# Altium PCB NaiS802HD_0.6.PcbDoc (part 2 of 2)
Units mm, origin at the board's own origin, x right, y up, seen from the top; angles counter-clockwise.
Board outline 60 x 38 mm, 4 copper layers (Top, INT1, GND, Bottom), stack 0.965 mm thick; 174 components, 229 nets, 707 pads, 347 vias.
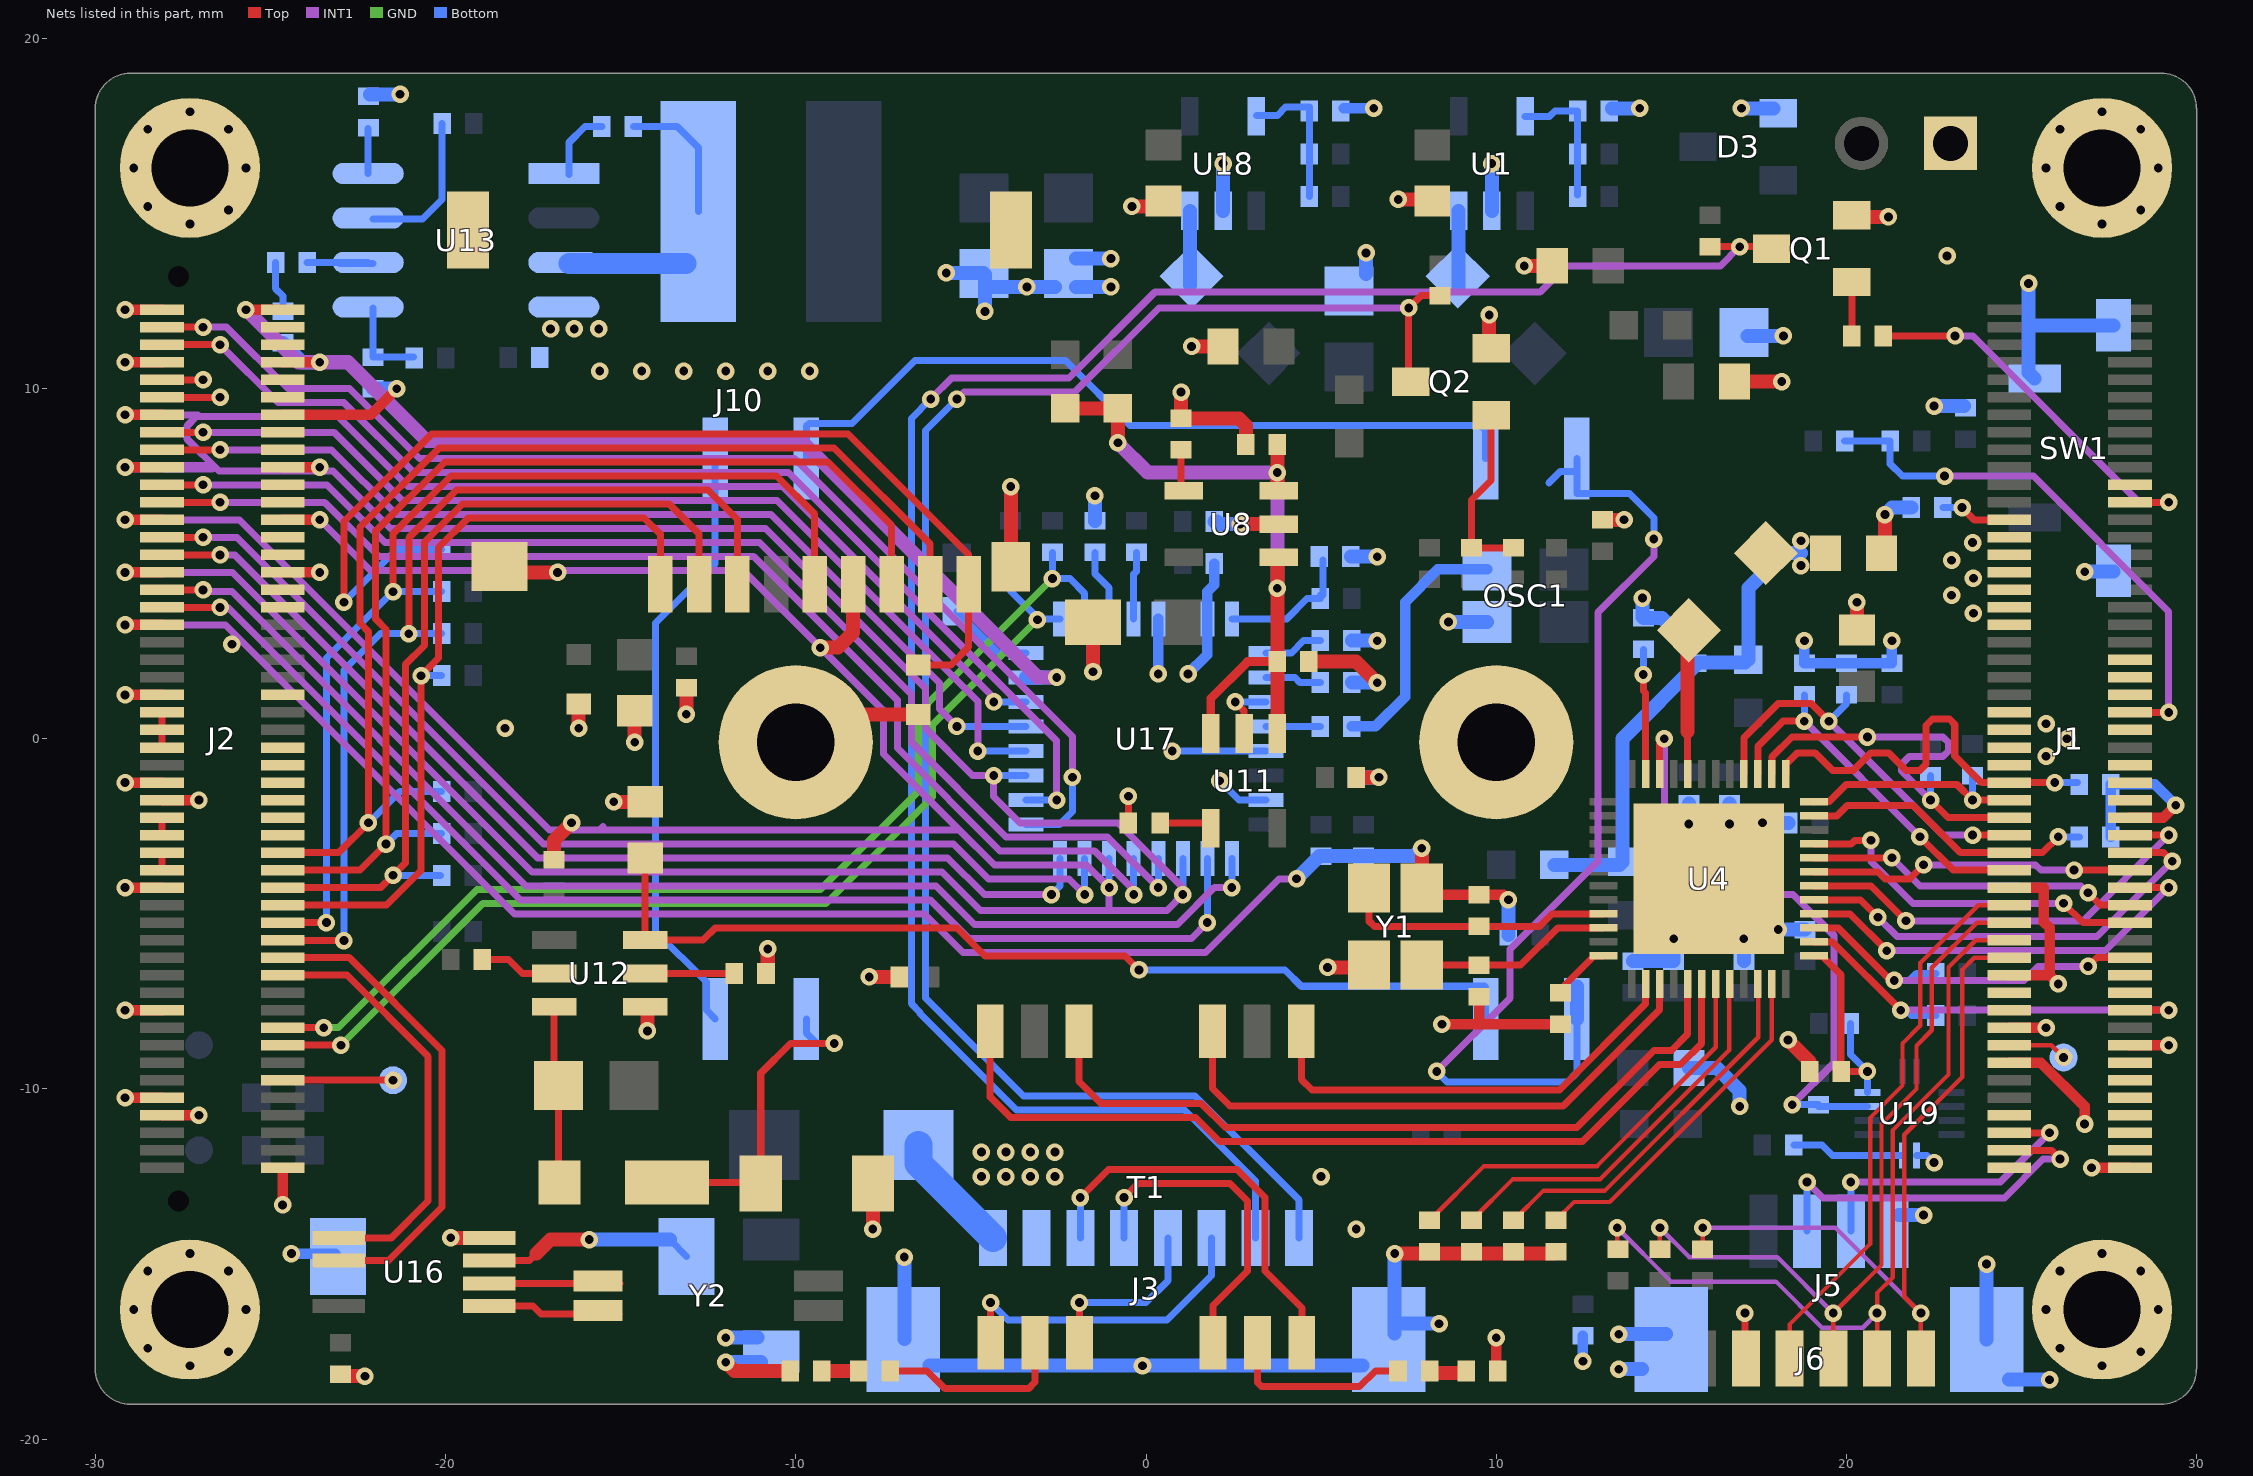
[diagram p4: the nets of this part, all layers, seen from the top]

## Via types
v1: diameter 0.5, hole 0.25, Top to Bottom, tented both sides, 345 vias
v2: diameter 0.5, hole 0.25, Top to Bottom, 2 vias

## Nets (pads, with @x,y where several pads share a name; then routed paths per layer and width w, separated by ;. In a path a pad name is that pad's centre, name@x,y a point inside that pad or via, vN(x,y) a via of type N, cw(c..) or ccw(c..) an arc to the next point about the centre after c; other vN are vias at no path point) (continued)
GND: BAT1.2 BC1.2 BC2.1 BC3.1 BC4.2 BC5.2 BC6.2 BC7.2 BC8.2 BC9.2 BC10.2 BC11.2 BC12.2 BC13.2 BC14.2 BC15.2 BC16.2 BC17.2 BC18.1 BC19.2 BC20.1 BC21.1 BC24.1 BC25.1 BC26.1 BC27.1 BC28.1 BC29.1 C1.1 C2.2 C4.2 C5.2 C7.2 C8.2 C9.2 C11.2 C17.1 C18.1 C19.2 C20.2 C21.2 C22.2 C23.1 C24.1 C25.1 C26.2 C27.1 C31.1 C32.2 C33.2 C34.1 C35.2 C36.2 C38.2 C39.2 C40.2 C41.2 C42.2 D3.1 J1.2 J1.13 J1.16 J1.17 J1.23 J1.33 J1.42 J1.47 J1.49 J1.51 J1.53 J1.63 J1.65 J1.67 J1.69 J1.71 J1.73 J2.1 J2.8 J2.10 J2.20 J2.34 J2.44 J2.46 J2.56 J2.64 J2.69 J2.70 J2.75 J2.76 J2.81 J2.82 J2.87 J2.88 J2.93 J2.94 J2.99 J2.100 J3.2 J3.9 J3.10 J4.1 J5.4 J5.5 J5.6 J6.2 J7.1 J7.2 J10.6 J10.9 J10.10 J10.11 J10.12 MH1.1 MH2.1 MH3.1 MH4.1 OSC1.2 Q1.2 Q2.2 R15.1 R16.1 R17.1 R19.2 R20.2 R21.2 R29.1 R31.1 R32.1 R34.1 R36.1 R38.1 R61.1 R68.2 SW1.2 SW1.3 SW1.4 TVS1.2 TVS2.2 U1.2 U4.M1 U8.2 U11.2 U12.4 U13.4 U16.4 U17.1 U17.3 U17.7 U17.10 U17.15 U17.18 U17.19 U17.25 U17.27 U17.31 U18.2 U19.7 Y1.2 Y1.4 | length 411.7
  Top w0.2: J2.1@-24.652,-12.257 J2.1@-24.645,-12.25 ; C31.1@-0.5,-2.4 v1(-0.5,-1.643) ; v1(2.55,1.05) 2.8,0.8 U11.2@2.8,0.15 ; J6.2@17.1,-17.875 v1(17.1,-16.4) ; J1.33@24.645,-4.25 J1.33@25,-4.25
  Top w0.3: v1(-29.15,-10.25) J2.10@-28.095,-10.25 ; v1(-29.15,-7.75) J2.20@-28.095,-7.75 ; v1(-29.15,-4.25) J2.34@-28.095,-4.25 ; v1(-29.15,-1.25) J2.46@-28.095,-1.25 ; v1(-29.15,1.25) J2.56@-28.095,1.25 ; v1(-29.15,3.25) J2.64@-28.095,3.25 ; v1(-29.15,4.75) J2.70@-28.095,4.75 ; v1(-29.15,6.25) J2.76@-28.095,6.25 ; v1(-29.15,7.75) J2.82@-28.095,7.75 ; v1(-29.15,9.25) J2.88@-28.095,9.25 ; v1(-29.15,10.75) J2.94@-28.095,10.75 ; v1(-29.15,12.25) J2.100@-28.095,12.25 ; J2.8@-28.095,-10.75 v1(-27.04,-10.75) ; J2.44@-28.095,-1.75 v1(-27.04,-1.75) ; v1(-25.7,12.25) J2.99@-24.645,12.25 ; v1(-24.652,-13.312) J2.1@-24.652,-12.257 ; J2.69@-24.645,4.75 v1(-23.59,4.75) ; J2.75@-24.645,6.25 v1(-23.59,6.25) ; J2.81@-24.645,7.75 v1(-23.59,7.75) ; J2.87@-24.645,9.25 -22.138,9.25 v1(-21.394,9.994) ; J2.93@-24.645,10.75 v1(-23.59,10.75) ; Y1.4@8.069,-4.457 C17.1@9.505,-4.457 10.207,-4.457 v1(10.35,-4.6) ; v1(8.45,-8.15) R32.1@11.836,-8.15 ; 9.513,-8.15 C18.1@9.513,-7.362 ; C21.2@10,-17.997 v1(10,-17.1) ; v1@10.375,-4.575 v1@10.4,-4.6 ; J1.13@24.645,-9.25 25.55,-9.25 26.8,-10.5 v1(26.8,-11) ; J1.17@24.645,-8.25 v1(25.7,-8.25) ; J1.23@24.645,-6.75 25.8,-6.75 ; J1.33@25,-4.25 25.635,-4.25 25.635,-5.235 25.8,-5.4 25.8,-6.75 ; v2(26.05,-7) 25.8,-6.75 ; v1(27,-12.25) J1.2@28.095,-12.25 ; J1.16@28.095,-8.75 v1(29.2,-8.75) ; J1.42@28.095,-2.25 29.05,-2.25 v1(29.4,-1.9)
  Top w0.4: BC27.1@-22.95,-18.2 v1(-22.3,-18.2) ; v1(-19.85,-14.25) U16.4@-18.75,-14.25 ; J10.10@-17.782,4.75 v1(-16.8,4.75) ; C32.2@-16.9,-3.45 -16.9,-2.9 v1(-16.4,-2.4) ; v1(-16.2,0.3) TVS1.2@-16.2,0.99 ; v1(-15.2,-1.8) R68.2@-14.3,-1.8 ; v1(-14.6,-0.1) C36.2@-14.6,0.8 ; v1(-14.236,-8.343) U12.4@-14.236,-7.714 ; v1(-13.127,0.7) C35.2@-13.127,1.461 ; v1(-12,-17.8) -11.753,-18.047 C22.2@-10.16,-18.047 ; C34.1@-10.8,-6.65 v1(-10.8,-6) ; v1(-9.3,2.6) -8.8,2.6 -8.362,3.038 J10.6@-8.362,4.412 ; J7.2@-9.21,0.69 TVS2.2@-6.5,0.69 ; v1(-7.9,-6.8) C20.2@-7.15,-6.8 ; v1(-7.8,-14) C33.2@-7.8,-12.7 ; J10.9@-3.86,4.911 v1(-3.86,7.2) ; v1(-1.513,1.913) BC19.2@-1.513,3.33 ; v1(-0.4,15.2) BC28.1@0.35,15.2 ; v1(1,9.9) C27.1@1,9.15 2.65,9.15 2.85,8.95 BC21.1@2.85,8.4 ; v1(1.3,11.2) BC29.1@2.157,11.2 ; v1(2.684,6.127) U8.2@3.877,6.127 ; BC26.1@4.65,2.2 6,2.2 v1(6.6,1.6) ; v1(5.185,-6.53) Y1.2@6.305,-6.53 ; C23.1@6.004,-1.1 v1(6.65,-1.1) ; v1(7.1,-14.7) C42.2@11.65,-14.7 ; v1(7.2,15.4) BC2.1@8.123,15.4 ; Y1.4@7.874,-4.261 v1(7.874,-3.126) ; Q2.2@9.8,11.203 v1(9.8,12.1) ; v1(10.8,13.5) BC3.1@11.6,13.5 ; BC24.1@13.034,6.25 v1(13.65,6.25) ; BC6.2@16.8,10.2 v1(18.15,10.2) ; J6.2@17.125,-18.175 J6.2@17.125,-17.7 J6.2@17.125,-17.1 ; v1(18.331,-8.6) 18.95,-9.219 C19.2@18.95,-9.5 ; Q1.2@20.203,14.9 v1(21.2,14.9) ; BC11.2@20.3,3.1 v1(20.3,3.9) ; BC17.2@21.1,5.4 v1(21.1,6.4)
  INT1 w0.2: v1(-29.15,3.25) -26.28,3.25 -18.03,-5 -6.325,-5 -5.225,-6.1 1.7,-6.1 3.8,-4 v1(4.3,-4) ; v1(-29.15,4.75) -26.083,4.75 -17.533,-3.8 -5.828,-3.8 -4.728,-4.9 0.6,-4.9 v1(1.05,-4.45) 1.05,-4.25 -0.8,-2.4 -3.6,-2.4 -4.35,-1.65 v1(-4.35,-1.05) -4.95,-1.05 -6.3,0.3 -6.3,1.431 -10.869,6 -21.569,6 -23.219,7.65 -26.473,7.65 -27.375,8.552 -27.375,8.936 -27.111,9.2 -23.072,9.2 -21.072,7.2 -10.372,7.2 -4.35,1.178 v1(-4.35,1.05) ; v1(-29.15,6.25) -25.886,6.25 -17.036,-2.6 -15.6,-2.6 ; v1(-29.15,9.25) -27.061,9.25 ; v1(-23.59,6.25) -22.14,4.8 -11.5,4.8 -7.5,0.8 -7.5,-0.431 -5.331,-2.6 ; -15.5,-2.5 -15.6,-2.6 ; -1.05,-4.9 v1(-1.05,-4.25) -1.7,-3.6 -4.331,-3.6 -5.331,-2.6 ; -15.6,-2.6 -5.331,-2.6
  INT1 w0.3: v1(-29.15,7.75) -26.673,7.75
  INT1 w0.4: v1(-25.7,12.25) -24.2,10.75 v1(-23.59,10.75) -22.783,10.75 -20.533,8.5 -9.833,8.5 -3.083,1.75 v1(-2.55,1.75)
  Bottom w0.2: v1(-4.35,-1.05) U17.15@-3.425,-1.05 ; v1(-4.35,1.05) U17.18@-3.425,1.05 ; v1(-1.05,-4.25) U17.10@-1.05,-3.425 ; v1(0.75,-0.35) U17.1@3.425,-0.35 ; v1(1.05,-4.45) U17.7@1.05,-3.425 ; v1(2.1,-1.2) 2.65,-1.75 U17.3@3.425,-1.75 ; v1(2.55,1.05) U17.31@3.425,1.05 ; v1(4.3,-4) v1@4.35,-4 ; U19.7@22,-11.9 22.3,-11.9 v1(22.5,-12.1)
  Bottom w0.3: v1(-24.4,-14.7) BAT1.2@-23.143,-14.7 ; v1(0.35,1.85) U17.25@0.35,3.425 ; v1(1.2,1.85) 1.75,2.4 U17.27@1.75,3.425 1.75,4.2 1.95,4.4 C25.1@1.95,5 ; R61.1@5.643,18 v1(6.5,18) ; v1(12.475,-17.775) BC1.2@12.475,-17.05 ; v1(18.8,2.8) R38.1@18.8,2.15 BC10.2@21.3,2.15 v1(21.3,2.8) ; R29.1@27.55,-2.8 R31.1@27.55,-1.3 28.8,-1.3 v1(29.4,-1.9)
  Bottom w0.4: R16.1@-24.645,11.3 -24.095,10.75 v1(-23.59,10.75) ; C9.2@-22.15,18.4 v1(-21.3,18.4) ; R17.1@-22.068,9.994 v1(-21.394,9.994) ; v1(-12,-17.8) C11.2@-11,-17.8 ; v1(-12,-17.1) C11.2@-11.1,-17.1 ; J3.10@-6.9,-17.133 v1(-6.9,-14.8) ; J3.10@-6.183,-17.9 v1(-0.1,-17.9) J3.9@6.183,-17.9 ; v1(-5.7,13.3) C5.2@-4.64,13.3 ; v1(-4.6,12.2) C5.2@-4.6,13.26 ; C5.2@-4.6,12.9 v1(-3.4,12.9) C4.2@-2.604,12.9 ; U17.19@-3.425,1.75 v1(-2.55,1.75) ; C4.2@-2,12.9 v1(-1,12.9) ; C4.2@-2,13.711 v1(-1,13.711) ; R21.2@-1.459,6.223 v1(-1.459,6.941) ; v1@1.2,1.8 v1@1.225,1.825 ; BC20.1@1.95,6.2 BC20.1@2.023,6.2 ; BC20.1@2.023,6.127 v1(2.684,6.127) ; U18.2@2.2,15.073 v1(2.2,16.423) ; v1(4.3,-4) C24.1@4.95,-3.35 ; C24.1@5,-3.35 BC25.1@6.208,-3.35 7.65,-3.35 v1(7.874,-3.126) ; C26.2@5.85,5.2 v1(6.6,5.2) ; R19.2@5.877,1.6 v1(6.6,1.6) ; R20.2@5.877,2.8 v1(6.6,2.8) ; BC18.1@6.004,-1.1 v1(6.65,-1.1) ; C38.2@6.284,13.264 v1(6.284,13.873) ; J3.9@7.1,-16.983 v1(7.1,-14.7) ; J3.9@7.1,-16.7 v1(8.366,-16.7) ; v1(8.634,3.334) OSC1.2@9.736,3.334 ; U1.2@9.873,15.073 v1(9.873,16.423) ; BC14.2@10.35,-5.6 v1(10.35,-4.6) ; R15.1@13.3,18 v1(14.1,18) ; v1(13.5,-18) J5.6@14.158,-18 ; v1(13.5,-17) J5.6@14.842,-17 ; BC9.2@13.9,-6.35 BC15.2@15.068,-6.35 v1(15.068,-5.711) ; R34.1@14.173,3.477 v1(14.173,4.016) ; R34.1@14.2,3.45 14.739,3.45 15.139,3.05 BC13.2@15.7,3.05 ; BC7.2@15.5,-9.4 16.3,-9.4 16.95,-10.05 v1(16.95,-10.5) ; v1(15.5,-2.433) BC5.2@15.5,-1.85 ; v1(16.663,-2.437) BC4.2@16.663,-1.853 ; v1(17,18) D3.1@17.913,18 ; BC16.2@17.068,-6.35 v1(17.068,-5.711) ; C7.2@17.18,11.5 v1(18.2,11.5) ; v1(17.6,-2.4) BC12.2@18.35,-2.4 ; v1(18.05,-5.45) BC8.2@18.818,-5.45 ; v1(21.1,6.4) 21.3,6.6 C1.1@21.85,6.6 ; J5.4@21.5,-13.6 v1(22.2,-13.6) ; v1(22.5,9.5) C2.2@23.35,9.5 ; J5.5@24,-17.158 v1(24,-15) ; J5.5@24.642,-18.3 v1(25.8,-18.3) ; 25.2,11.8 SW1.4@27.63,11.8 ; v1(25.2,13) 25.2,10.46 SW1.2@25.37,10.29 ; v1(26.804,4.77) SW1.3@27.63,4.77
  other v1: -27.3,-17.9 27.3,-17.9 -26.2,-17.5 28.4,-17.5 -28.5,-17.4 26.1,-17.4 -28.9,-16.3 -25.7,-16.3 25.7,-16.3 28.9,-16.3 -28.5,-15.2 -26.2,-15.2 26.1,-15.2 28.4,-15.2 -27.3,-14.7 27.3,-14.7 6,-14 -4.7,-12.5 -4,-12.5 -3.3,-12.5 -2.6,-12.5 5,-12.5 -4.7,-11.8 -4,-11.8 -3.3,-11.8 -2.6,-11.8 25.7,-0.5 26.3,0 -18.3,0.3 25.7,0.427 -26.1,2.7 23.627,3.584 23,4.1 23.627,4.584 23,5.1 23.6,5.6 -15.6,10.5 -14.4,10.5 -13.2,10.5 -12,10.5 -10.8,10.5 -9.6,10.5 -17,11.7 -16.327,11.7 -15.627,11.7 22.873,13.784 -27.3,14.7 27.3,14.7 -26.2,15.1 28.4,15.1 -28.5,15.2 26.1,15.2 -28.9,16.3 -25.7,16.3 25.7,16.3 28.9,16.3 -28.5,17.4 -26.2,17.4 26.1,17.4 28.4,17.4 -27.3,17.9 27.3,17.9
HDMI_INT: J1.24
HDMI_RSTN: J2.55
HP_INSERT_DET: J1.80
IIC_CLK: J2.25 U16.6 | length 13.7
  Top w0.2: J2.25@-24.645,-6.25 -22.75,-6.25 -20.1,-8.9 -20.1,-13.366 -21.634,-14.9 U16.6@-23.05,-14.9
IIC_SDA: J2.23 U16.5 | length 12.2
  Top w0.2: J2.23@-24.645,-6.75 -22.816,-6.75 -20.5,-9.066 -20.5,-13.2 -21.55,-14.25 U16.5@-23.05,-14.25
INT_N: R46.1 U4.34 U19.11 | length 17.4
  Top w0.2: U4.34@14.668,-1 14.668,-0.132 v1(14.8,0)
  INT1 w0.2: v1(14.8,0) 14.8,-2.9 16.35,-4.45 18.476,-4.45 19.65,-5.624 19.65,-9.25 v1(18.45,-10.45)
  Bottom w0.2: v1(18.45,-10.45) R46.1@19.2,-10.45 ; R46.1@19.2,-10.5 U19.11@20.6,-10.5
IR_ANODE: C33.1 D4.2 LD1.1 | length 9.5
  Top w0.2: D4.2@-13.675,-12.672 -11.172,-12.672 C33.1@-11.1,-12.6 ; C33.1@-11,-12.7 -11,-9.55 -10.15,-8.7 v1(-8.9,-8.7)
  Bottom w0.2: LD1.1@-9.7,-8 -9.7,-8.4 -9.4,-8.7 v1(-8.9,-8.7)
IR_CATHODE: LD4.2 R68.1 U12.6 | length 28
  Top w0.2: R68.1@-14.3,-3.5 U12.6@-14.3,-5.75 -12.65,-5.75 -12.3,-5.4 -5.4,-5.4 -4.6,-6.2 -0.6,-6.2 v1(-0.2,-6.6)
  Bottom w0.2: v1(-0.2,-6.6) 3.966,-6.6 4.433,-7.067 9.667,-7.067 9.7,-7.1 LD4.2@9.7,-8
KEY_1: J1.54 R6.1 R7.1 | length 15.6
  Top w0.2: J1.54@28.095,0.75 v1(29.2,0.75)
  INT1 w0.2: v1(22.8,7.5) 25.336,7.5 29.2,3.636 v1(29.2,0.75)
  Bottom w0.2: R6.1@19.95,8.5 R7.1@21.25,8.5 21.25,7.85 21.6,7.5 v1(22.8,7.5)
KEY_2: J1.56
LCD_EN: J1.46
LCD_RST: J1.44
LED0: J3.7 Q1.3 R1.1 | length 57.7
  Top w0.2: R1.1@16.1,14.05 v1(16.95,14.05) Q1.3@17.861,14.05
  INT1 w0.2: v1(-6.148,9.7) -5.548,10.3 -2.2,10.3 0.25,12.75 11.25,12.75 12,13.5 16.4,13.5 v1(16.95,14.05)
  Bottom w0.2: v1(-6.148,9.7) -6.7,9.148 -6.7,-7.566 -6.45,-7.816 -6.45,-7.85 -3.7,-10.6 1.1,-10.6 3.125,-12.625 J3.7@3.125,-14.258
LED1: J3.8 Q2.3 R2.1 | length 48.7
  Top w0.2: Q2.3@7.5,10.256 v1(7.5,12.3) 7.85,12.65 R2.1@8.4,12.65
  INT1 w0.2: v1(-5.4,9.7) -5.2,9.9 -2.034,9.9 0.366,12.3 v1(7.5,12.3)
  Bottom w0.2: v1(-5.4,9.7) -6.3,8.8 -6.3,-7.4 -3.5,-10.2 1.4,-10.2 4.375,-13.175 J3.8@4.375,-14.258
LED_AD0: R34.2 U4.35 | length 3.6
  Top w0.2: v1(14.2,1.832) 14.2,1.368 14.268,1.3 U4.35@14.268,-1
  Bottom w0.2: v1(14.2,1.832) R34.2@14.2,2.55
LED_GN: Q2.1 R3.1 R5.1 | length 5.2
  Top w0.2: Q2.1@9.854,9.241 9.854,7.377 9.292,6.815 R5.1@9.292,5.45 R3.1@10.494,5.45
LED_MLINK: Q1.1 R4.1 | length 1.5
  Top w0.2: R4.1@20.154,11.504 Q1.1@20.154,13.041
LX_1V2: BC13.1 BC17.1 FB3.1 FB4.1 FB11.2 L4.1 | length 14
  Bottom w0.4: FB11.2@11.662,-3.6 13.514,-3.6 FB4.1@13.6,-3.514 13.6,0 15.78,2.18 17.105,2.18 FB3.1@17.2,2.275 ; FB3.1@17.2,2.262 FB3.1@17.2,2.275 ; 18.7,5.3 18.2,5.3 17.2,4.3 FB3.1@17.2,2.275
  other v1: 18.7,4.943 18.7,5.657
MCLK: R55.2 U17.32 | length 1.6
  Bottom w0.2: U17.32@3.425,0.35 R55.2@4.977,0.35
MDI0N: T1.3 U4.3 | length 16.3
  Top w0.2: T1.3@1.898,-8.555 1.898,-9.987 2.4,-10.489 11.912,-10.489 14.668,-7.733 U4.3@14.668,-7
MDI0P: T1.1 U4.2 | length 12.7
  Top w0.2: T1.1@4.436,-8.555 4.436,-9.736 4.734,-10.034 11.801,-10.034 14.268,-7.568 U4.2@14.268,-7
MDI1N: T1.8 U4.6 | length 25.4
  Top w0.2: T1.8@-4.452,-8.555 -4.452,-10.223 -3.863,-10.812 1.412,-10.812 2.1,-11.5 12.466,-11.5 14.666,-9.3 15.266,-9.3 15.868,-8.698 U4.6@15.868,-7
MDI1P: T1.6 U4.5 | length 21.9
  Top w0.2: T1.6@-1.912,-8.355 -1.912,-9.788 -1.288,-10.412 1.578,-10.412 2.266,-11.1 12.3,-11.1 14.5,-8.9 15,-8.9 15.468,-8.432 U4.5@15.468,-7
MDI2N: C40.1 U4.8 | length 11.3
  Top w0.127: C40.1@9.3,-13.75 10.477,-12.573 12.969,-12.573 16.654,-8.888 16.654,-7.014 U4.8@16.668,-7
MDI2P: C39.1 U4.7 | length 12
  Top w0.127: C39.1@8.1,-13.75 9.65,-12.2 12.88,-12.2 16.268,-8.812 U4.7@16.268,-7
MDI3N: C42.1 U4.11 | length 9.9
  Top w0.127: C42.1@11.7,-13.75 12.223,-13.227 13.24,-13.227 17.868,-8.599 U4.11@17.868,-7
MDI3P: C41.1 U4.10 | length 10.7
  Top w0.127: C41.1@10.5,-13.75 11.35,-12.9 13.105,-12.9 17.481,-8.523 17.481,-7.014 U4.10@17.468,-7
MIC_DATA_PDM: J1.1
MIC_SCLK_PDM: J1.7
MIPI_CSI_CLK0_DN: J2.74 U17.11 | length 31.6
  Top w0.2: J2.74@-28.095,5.75 v1(-26.925,5.75)
  INT1 w0.2: v1(-26.925,5.75) -25.952,5.75 -17.202,-3 -5.497,-3 -4.497,-4 -2.2,-4 v1(-1.75,-4.45)
  Bottom w0.2: v1(-1.75,-4.45) U17.11@-1.75,-3.425
MIPI_CSI_CLK0_DP: J2.72 U17.12 | length 30.5
  Top w0.2: J2.72@-28.095,5.25 v1(-26.436,5.25)
  INT1 w0.2: v1(-26.436,5.25) -26.018,5.25 -17.368,-3.4 -5.663,-3.4 -4.613,-4.45 v1(-2.7,-4.45)
  Bottom w0.2: v1(-2.7,-4.45) -2.45,-4.2 U17.12@-2.45,-3.425
MIPI_CSI_CLK1_DN: J2.90 | length 1.7
  Top w0.2: J2.90@-28.095,9.75 v1(-26.436,9.75)
MIPI_CSI_CLK1_DP: J2.92 | length 1.1
  Top w0.2: J2.92@-28,10.25 v1(-26.925,10.25) v1@-26.895,10.25
MIPI_CSI_D0_N: J2.68 U17.5 | length 35.8
  Top w0.2: J2.68@-28.095,4.25 v1(-26.925,4.25)
  INT1 w0.2: v1(-26.925,4.25) -26.875,4.2 -26.099,4.2 -17.699,-4.2 -5.994,-4.2 -4.894,-5.3 -1.398,-5.3 -0.702,-5.3 0.9,-5.3 1.95,-4.25 v1(2.45,-4.25)
  Bottom w0.2: v1(2.45,-4.25) U17.5@2.45,-3.425
MIPI_CSI_D0_P: J2.66 U17.6 | length 35.8
  Top w0.2: J2.66@-28.095,3.75 v1(-26.436,3.75)
  INT1 w0.2: v1(-26.436,3.75) -26.215,3.75 -17.865,-4.6 -6.16,-4.6 -5.06,-5.7 -1.232,-5.7 -0.868,-5.7 1.3,-5.7 v1(1.75,-5.25)
  Bottom w0.2: v1(1.75,-5.25) U17.6@1.75,-3.425
MIPI_CSI_D1_N: J2.80 U17.8 | length 34.8
  Top w0.2: J2.80@-28,7.25 v1(-26.925,7.25) v1@-26.895,7.25
  INT1 w0.2: v1(-26.925,7.25) -23.384,7.25 -21.734,5.6 -11.034,5.6 -6.7,1.266 -6.7,-0.1 -4,-2.8 -1.1,-2.8 v1(0.35,-4.25)
  Bottom w0.2: v1(0.35,-4.25) U17.8@0.35,-3.425
MIPI_CSI_D1_P: J2.78 U17.9 | length 34.3
  Top w0.2: J2.78@-28.095,6.75 v1(-26.436,6.75)
  INT1 w0.2: v1(-26.436,6.75) -23.45,6.75 -21.9,5.2 -11.2,5.2 -7.1,1.1 -7.1,-0.266 -4.166,-3.2 -1.464,-3.2 -0.35,-4.314 v1(-0.35,-4.45)
  Bottom w0.2: v1(-0.35,-4.45) U17.9@-0.35,-3.425
MIPI_CSI_D2_N: J2.84 U17.17 | length 28.4
  Top w0.2: J2.84@-28.095,8.25 v1(-26.436,8.25)
  INT1 w0.2: v1(-26.436,8.25) -23.253,8.25 -21.403,6.4 -10.703,6.4 -5.9,1.597 -5.9,0.85 v1(-5.4,0.35)
  Bottom w0.2: v1(-5.4,0.35) U17.17@-3.425,0.35
MIPI_CSI_D2_P: J2.86 U17.16 | length 29.2
  Top w0.2: J2.86@-28,8.75 v1(-26.925,8.75) v1@-26.895,8.75
  INT1 w0.2: v1(-26.925,8.75) -23.187,8.75 -21.237,6.8 -10.537,6.8 -4.801,1.064 v1(-4.801,-0.35)
  Bottom w0.2: v1(-4.801,-0.35) U17.16@-3.425,-0.35
MIPI_CSI_D3_N: J2.96 U17.14 | length 32.8
  Top w0.2: J2.96@-28.095,11.25 v1(-26.436,11.25)
  INT1 w0.2: v1(-26.436,11.25) -24.786,9.6 -22.906,9.6 -20.906,7.6 -10.206,7.6 -2.55,-0.056 v1(-2.55,-1.75)
  Bottom w0.2: U17.14@-3.425,-1.75 v1(-2.55,-1.75)
MIPI_CSI_D3_P: J2.98 U17.13 | length 34.4
  Top w0.2: J2.98@-28,11.75 v1(-26.925,11.75) v1@-26.895,11.75
  INT1 w0.2: v1(-26.925,11.75) -26.25,11.75 -24.5,10 -22.74,10 -20.74,8 -10.04,8 -2.1,0.06 v1(-2.1,-1.1)
  Bottom w0.2: U17.13@-3.425,-2.45 -2.47,-2.45 -2.1,-2.08 v1(-2.1,-1.1)
MIPI_CSI_I2C_SCL: J2.17 R54.2 U17.22 | length 31.2
  Top w0.2: J2.17@-24.645,-8.25 v1(-23.475,-8.25)
  GND w0.2: v1(-23.475,-8.25) -23.052,-8.25 -19.102,-4.3 -9.3,-4.3 -6.5,-1.5 -6.5,0.746 v1(-2.673,4.573)
  Bottom w0.2: R54.2@-2.673,5.323 v1(-2.673,4.573) -2.173,4.573 -1.75,4.15 U17.22@-1.75,3.425
MIPI_CSI_I2C_SDA: J2.15 R53.2 U17.21 | length 30.6
  Top w0.2: J2.15@-24.645,-8.75 v1(-22.986,-8.75)
  GND w0.2: v1(-22.986,-8.75) -18.936,-4.7 -9.134,-4.7 -6.1,-1.666 -6.1,0.4 v1(-3.1,3.4)
  Bottom w0.2: R53.2@-3.873,5.323 -3.873,4.223 -3.075,3.425 U17.21@-2.45,3.425
MIPI_DSI_CLKN: J2.83
MIPI_DSI_CLKP: J2.85
MIPI_DSI_D0N: J2.71
MIPI_DSI_D0P: J2.73
MIPI_DSI_D1N: J2.77
MIPI_DSI_D1P: J2.79
MIPI_DSI_D2N: J2.89
MIPI_DSI_D2P: J2.91
MIPI_DSI_D3N: J2.95
MIPI_DSI_D3P: J2.97
MIPI_SWITCH_SEL: J1.22
MMC1_CLK: J1.4
MMC1_CMD: J1.6
MMC1_D0: J1.14
MMC1_D1: J1.12
MMC1_D2: J1.10
MMC1_D3: J1.8
N21617464: D2.1 J3.1 | length 3.5
  Bottom w0.8: D2.1@-6.5,-11.6 -6.5,-12.133 J3.1@-4.375,-14.258
N21624957: C21.1 R51.1 | length 1.1
  Top w0.4: R51.1@8.095,-18.106 C21.1@9.15,-18.106
N21624998: C22.1 R52.1 | length 1.1
  Top w0.4: C22.1@-9.26,-18.047 R52.1@-8.205,-18.047
N21750160: C27.2 U8.4 | length 1.3
  Top w0.2: U8.4@1,7 C27.2@1,8.25
N21750453: C31.2 U11.4 | length 1.3
  Top w0.2: C31.2@0.4,-2.4 U11.4@1.7,-2.4
N21759423: L2.1 U1.3 | length 2.2
  Bottom w0.4: L2.1@8.923,12.873 U1.3@8.923,15.073
N21759480: C6.2 R13.1 R15.2 U1.5 | length 4
  Bottom w0.2: U1.5@10.823,17.773 11.523,17.773 11.673,17.923 R15.2@12.323,17.923 C6.2@12.323,15.523
N21760304: D4.1 L5.1 U12.3 | length 4.9
  Top w0.2: L5.1@-16.9,-9.78 U12.3@-16.9,-7.65 ; D4.1@-16.779,-12.642 L5.1@-16.779,-9.9
N21760358: R67.1 U12.2 | length 2.2
  Top w0.2: R67.1@-18.95,-6.3 -18.2,-6.3 -17.8,-6.7 U12.2@-16.9,-6.7
N21760373: C34.2 U12.5 | length 2.5
  Top w0.2: U12.5@-14.3,-6.7 C34.2@-11.75,-6.7
N21768552: L4.2 U4.32 | length 4.3
  Top w0.2: U4.32@15.468,-1 15.468,0.203
  Top w0.4: 15.468,0.203 15.468,2.668 L4.2@15.9,3.1
N21768580: R32.2 U4.48 | length 1.6
  Top w0.2: R32.2@11.836,-7.16 12.795,-6.2 U4.48@13.068,-6.2
N21776461: OSC1.3 R55.1 | length 7.3
  Bottom w0.3: R55.1@5.877,0.35 6.55,0.35 7.4,1.2 7.4,3.9 8.334,4.834 OSC1.3@9.736,4.834
N21781792: U16.1 Y2.1 | length 3.8
  Top w0.2: U16.1@-18.75,-16.2 -17.5,-16.2 -17.28,-16.42 Y2.1@-15.05,-16.42
N21781837: U16.2 Y2.4 | length 3.7
  Top w0.2: U16.2@-18.75,-15.55 Y2.4@-15.02,-15.55
N21781846: BAT1.1 U16.3 | length 6.1
  Top w0.2: U16.3@-18.75,-14.9 -17.6,-14.9 -17.4,-14.7
  Top w0.4: -17.4,-14.7 -17,-14.3 v1(-15.9,-14.3)
  Bottom w0.2: BAT1.1@-13.593,-14.3 BAT1.1@-13.115,-14.778
  Bottom w0.4: v1(-15.9,-14.3) BAT1.1@-13.593,-14.3
N21818343: L6.1 U18.3 | length 2.1
  Bottom w0.4: L6.1@1.25,12.95 U18.3@1.25,15.073
N21818417: C28.2 R58.1 R61.2 U18.5 | length 4.2
  Bottom w0.2: U18.5@3.15,17.8 3.75,17.8 3.988,18.038 4.666,18.038 C28.2@4.666,15.483
N21823039: C26.1 R56.1 U17.28 | length 3.8
  Bottom w0.2: U17.28@2.45,3.425 4.025,3.425 4.6,4 R56.1@4.977,4 ; R56.1@4.977,4.1 5.05,4.1 C26.1@5.05,5.1
N21823647: LD1.2 LD2.1 | length 17.4
  Bottom w0.2: LD1.2@-12.3,-8 -12.55,-7.75 -12.55,-6.95 -14,-5.5 -14,3.3 -12.3,5 LD2.1@-12.3,8
N21823649: LD2.2 LD3.1 | length 22.7
  Bottom w0.2: LD2.2@-9.7,8 -9.7,8.925 -9.625,9 -8.4,9 -6.6,10.8 -2.3,10.8 -0.45,8.95 9.55,8.95 9.7,8.8 LD3.1@9.7,8
N21823677: LD3.2 LD4.1 | length 29.4
  INT1 w0.2: v1(8.3,-9.5) 10.4,-7.4 10.4,-6 12.9,-3.5 12.9,3.6 14.5,5.2 v1(14.5,5.7)
  Bottom w0.2: v1(8.3,-9.5) 8.6,-9.8 12.035,-9.8 12.3,-9.535 LD4.1@12.3,-8 ; 11.5,7.3 11.837,7.637 LD3.2@12.247,7.637 ; LD3.2@12.3,8 12.3,7 13.8,7 14.5,6.3 v1(14.5,5.7)
  Bottom w0.4: LD4.1@12.3,-8 LD4.1@12.3,-7.075
N21825549: C3.2 L1.1 U13.3 | length 7.3
  Bottom w0.2: C3.2@-14.635,17.485 -13.385,17.485 -12.783,16.883 L1.1@-12.783,15.055
  Bottom w0.6: U13.3@-16.482,13.576 L1.1@-13.129,13.576
N21825600: R11.2 U13.7 | length 4.4
  Bottom w0.2: U13.7@-22.07,14.846 -20.654,14.846 -20.1,15.4 R11.2@-20.1,17.564
N21825631: R12.2 R17.2 U13.5 | length 2.6
  Bottom w0.2: U13.5@-22.07,12.306 -22.07,10.896 R17.2@-22.068,10.894 R12.2@-20.919,10.894
N21825652: C9.1 U13.8 | length 1.3
  Bottom w0.2: U13.8@-22.208,16.139 C9.1@-22.208,17.429
N21825662: C10.1 U13.6 | length 2.7
  Bottom w0.2: C10.1@-23.949,13.599 U13.6@-22.208,13.599 ; U13.6@-23.024,13.576 U13.6@-22.07,13.576
N21825703: C10.2 R16.2 | length 1.5
  Bottom w0.2: C10.2@-24.85,13.6 -24.85,12.85 -24.645,12.645 R16.2@-24.645,12.2
N21833189: R41.1 U19.8 | length 3.2
  Bottom w0.2: R41.1@18.5,-11.6 19.3,-11.6 19.6,-11.9 U19.8@21.6,-11.9
N21846940: FB12.1 U17.20 | length 2.5
  Bottom w0.2: FB12.1@-5.4,3.638 -4.212,2.45 U17.20@-3.425,2.45
N21847187: R18.2 U17.24 | length 1.9
  Bottom w0.2: U17.24@-0.35,3.425 -0.35,4.7 -0.273,4.777 R18.2@-0.273,5.323
N21847468: R19.1 U17.30 | length 1.6
  Bottom w0.2: U17.30@3.425,1.75 4.25,1.75 4.4,1.6 R19.1@4.977,1.6
N21847471: R20.1 U17.29 | length 1.7
  Bottom w0.2: U17.29@3.425,2.45 4.15,2.45 4.5,2.8 R20.1@4.977,2.8
N21847474: R21.1 U17.23 | length 2.1
  Bottom w0.2: R21.1@-1.459,5.323 -1.459,4.711 -1.05,4.302 U17.23@-1.05,3.425
N218255250: C3.1 U13.1 | length 2
  Bottom w0.2: U13.1@-16.482,16.116 -16.482,17.018 -16.015,17.485 C3.1@-15.535,17.485
POE_LINE_1_2+: R51.2 T1.15 | length 5.4
  Top w0.2: T1.15@3.182,-17.245 3.182,-18.382 3.3,-18.5 6.1,-18.5 6.553,-18.047 R51.2@7.195,-18.047
POE_LINE_3_6-: R52.2 T1.10 | length 5.6
  Top w0.2: R52.2@-7.305,-18.047 -6.253,-18.047 -5.742,-18.558 -3.358,-18.558 -3.168,-18.368 T1.10@-3.168,-17.245
QSPI_NAND_CLK: J2.41
QSPI_NAND_CS: J2.39
QSPI_NAND_IO0: J2.45
QSPI_NAND_IO1: J2.43
QSPI_NAND_IO2: J2.49
QSPI_NAND_IO3: J2.47
RESET_N: C19.1 R44.2 U4.13 U19.12 | length 6.7
  Top w0.2: U4.13@19.068,-6.2 19.3,-6.2 19.85,-6.75 C19.1@19.85,-9.5 v1(20.6,-9.5)
  Bottom w0.2: R44.2@20.112,-8.135 20.112,-9.012 v1(20.6,-9.5) U19.12@20.6,-10.1
RGMII_MDC: J1.20 R27.2 U4.14 | length 13.1
  Top w0.2: U4.14@19.068,-5.8 19.6,-5.8 v1(21.55,-7.75) ; J1.20@28.095,-7.75 v1(29.2,-7.75)
  INT1 w0.2: v1(21.55,-7.75) v1(29.2,-7.75)
  Bottom w0.2: v1(21.55,-7.75) 21.707,-7.75 21.857,-7.9 R27.2@22.55,-7.9
RGMII_MDIO: J1.26 R28.2 U4.15 | length 11.2
  Top w0.2: U4.15@19.068,-5.4 19.766,-5.4 21.266,-6.9 v1(21.366,-6.9) ; v2(26.9,-6.5) 27.15,-6.25 J1.26@28.095,-6.25
  INT1 w0.2: v1(21.366,-6.9) 25.072,-6.9 25.472,-6.5 v2(26.9,-6.5)
  Bottom w0.2: v1(21.366,-6.9) 21.793,-6.9 21.993,-6.7 R28.2@22.55,-6.7
RGMII_RXC: J1.39 R36.2 U4.28 | length 11.5
  Top w0.2: U4.28@17.068,-1 17.068,0.02 18.047,1 19,1 v1(19.5,0.5) ; v1(23.6,-2.75) J1.39@24.645,-2.75
  INT1 w0.2: v1(19.5,0.5) 22.75,-2.75 v1(23.6,-2.75)
  Bottom w0.2: v1(19.5,0.5) 20,1 R36.2@20,1.25
RGMII_RXCTL: J1.35 R38.2 U4.27 | length 12.4
  Top w0.2: U4.27@17.468,-1 17.468,-0.217 18.185,0.5 v1(18.798,0.5) ; v1(22.098,-2.8) 23.048,-3.75 J1.35@24.645,-3.75 ; 23.055,-3.755 J1.35@24.645,-3.755
  INT1 w0.2: v1(18.798,0.5) v1(22.098,-2.8)
  Bottom w0.2: v1(18.798,0.5) R38.2@18.798,1.248
RGMII_RXD0: J1.41 R42.1 U4.26 | length 12.1
  Top w0.2: U4.26@17.868,-1 17.868,-0.522 18.44,0.05 v1(20.6,0.05) ; v1(22.4,-1.75) 22.9,-2.25 J1.41@24.645,-2.25
  INT1 w0.2: v1(20.6,0.05) 22.75,0.05 22.908,-0.108 22.908,-0.346 22.754,-0.5 21.8,-0.5 21.573,-0.727 21.573,-0.923 v1(22.4,-1.75)
  Bottom w0.2: v1(22.4,-1.75) R42.1@22.4,-1.05
RGMII_RXD1: J1.45 R31.2 U4.25 | length 11.9
  Top w0.2: U4.25@18.268,-1 18.268,-0.732 18.6,-0.4 19.1,-0.4 19.6,-0.9 20.2,-0.9 20.7,-0.4 21.2,-0.4 21.7,-0.9 22.1,-0.9 22.273,-0.727 22.273,0.373 22.462,0.562 22.938,0.562 23.092,0.408 23.092,-0.492 23.85,-1.25 J1.45@24.645,-1.25 v1(25.95,-1.25)
  Bottom w0.2: v1(25.95,-1.25) R31.2@26.6,-1.25
RGMII_RXD2: J1.43 R30.2 U4.24 | length 6.6
  Top w0.2: U4.24@19.068,-1.8 19.078,-1.79 19.511,-1.79 19.512,-1.789 19.512,-1.784 19.996,-1.3 23.15,-1.3 v1(23.6,-1.75) ; v1@23.65,-1.75 J1.43@24.645,-1.75
  Bottom w0.2: v1(23.6,-1.75) R30.2@23.6,-1.05
RGMII_RXD3: J1.37 R29.2 U4.23 | length 7.6
  Top w0.2: U4.23@19.068,-2.2 19.734,-2.2 20.034,-1.9 21.9,-1.9 23.25,-3.25 J1.37@24.098,-3.25 ; J1.37@24.9,-3.25 25.6,-3.25 v1(26.05,-2.8)
  Bottom w0.2: v1(26.05,-2.8) R29.2@26.65,-2.8
RGMII_TXC: J1.30 U4.21 | length 10.4
  Top w0.2: U4.21@19.068,-3 20.136,-3 20.236,-2.9 v1(20.7,-2.9) ; v1(26.2,-4.7) 26.75,-5.25 J1.30@28.095,-5.25
  INT1 w0.2: v1(20.7,-2.9) 20.7,-3.5 21.9,-4.7 v1(26.2,-4.7)
RGMII_TXCTL: J1.32 U4.20 | length 9.6
  Top w0.2: U4.20@19.068,-3.4 v1(21.3,-3.4) ; v1(26.9,-4.4) 27.25,-4.75 J1.32@28.095,-4.75
  INT1 w0.2: v1(21.3,-3.4) 22.1,-4.2 26.7,-4.2 v1(26.9,-4.4)
RGMII_TXD0: J1.36 U4.19 | length 9.3
  Top w0.2: U4.19@19.068,-3.8 20.9,-3.8 21.1,-4 21.8,-4 v1(22.2,-3.6) ; v1(26.5,-3.75) J1.36@28.095,-3.75
  INT1 w0.2: v1(22.2,-3.6) 25.4,-3.6 25.55,-3.75 v1(26.5,-3.75)
RGMII_TXD1: J1.40 U4.18 | length 12.7
  Top w0.2: U4.18@19.068,-4.2 20.7,-4.2 v1(21.7,-5.2) ; J1.40@28.095,-2.75 v1(29.2,-2.75)
  INT1 w0.2: v1(21.7,-5.2) 26.75,-5.2 v1(29.2,-2.75)
RGMII_TXD2: J1.38 U4.17 | length 12.9
  Top w0.2: U4.17@19.068,-4.6 20.4,-4.6 v1(20.9,-5.1) ; J1.38@28.095,-3.25 29.05,-3.25 v1(29.3,-3.5)
  INT1 w0.2: v1(20.9,-5.1) 21.45,-5.65 27.15,-5.65 v1(29.3,-3.5)
RGMII_TXD3: J1.34 U4.16 | length 12.4
  Top w0.2: U4.16@19.068,-5 20.1,-5 v1(21.15,-6.05) ; J1.34@28.095,-4.25 v1@29.19,-4.25
  INT1 w0.2: v1(21.15,-6.05) 27.4,-6.05 v1(29.2,-4.25)
RXD_DEBUG: J1.5 J5.3 | length 8.8
  Top w0.2: J1.5@24.645,-11.25 v1(25.8,-11.25)
  INT1 w0.2: v1(20.125,-12.659) 24.391,-12.659 v1(25.8,-11.25)
  Bottom w0.2: J5.3@20.125,-14.058 v1(20.125,-12.659) v1@20.125,-12.625
SD2_CLK: J2.29 J10.5 R71.1 | length 29.7
  Top w0.2: J2.29@-24.645,-5.25 v1(-23.4,-5.25) ; v1(-21.5,4.2) -21.5,5.854 -19.849,7.505 -10.549,7.505 -9.459,6.415 J10.5@-9.459,4.412
  Bottom w0.2: v1(-23.4,-5.25) -23.4,2.3 v1(-21.5,4.2) R71.1@-20.11,4.2
SD2_CMD: J2.27 J10.3 R72.1 | length 27.6
  Top w0.2: J2.27@-24.634,-5.761 v1(-22.9,-5.761) ; v1(-21.05,3) -21.05,5.739 -19.683,7.105 -12.507,7.105 -11.665,6.263 J10.3@-11.665,4.412
  Bottom w0.2: v1(-22.9,-5.761) -22.9,1.958 -21.858,3 v1(-21.05,3) R72.1@-20.11,3
SD2_DATA0: J2.35 J10.7 R76.1 | length 32
  Top w0.2: J2.35@-24.645,-3.75 -22.443,-3.75 v1(-21.7,-3.007) -21.7,3.121 -21.994,3.415 -21.994,5.926 -20.015,7.905 -9.076,7.905 -7.266,6.095 J10.7@-7.266,4.412
  Bottom w0.2: v1(-21.7,-3.007) -21.393,-2.7 R76.1@-20.11,-2.7
SD2_DATA1: J2.37 J10.8 R75.1 | length 33.3
  Top w0.2: J2.37@-24.645,-3.25 -23.05,-3.25 v1(-22.2,-2.4) -22.2,3.055 -22.445,3.3 -22.445,6.041 -20.181,8.305 -8.91,8.305 -6.161,5.555 J10.8@-6.161,4.412
  Bottom w0.2: v1(-22.2,-2.4) -21.3,-1.5 R75.1@-20.11,-1.5
SD2_DATA2: J2.31 J10.1 R74.1 | length 22.6
  Top w0.2: J2.31@-24.645,-4.75 -21.683,-4.75 -20.7,-3.767 v1@-20.7,1.7 ; v1(-20.7,1.8) -20.2,2.3 -20.2,5.457 -19.352,6.305 -14.332,6.305 -13.866,5.839 J10.1@-13.866,4.412
  Bottom w0.2: v1(-20.7,1.8) R74.1@-20.11,1.8
SD2_DATA3: J2.33 J10.2 R73.1 | length 24.6
  Top w0.2: J2.33@-24.645,-4.25 -21.85,-4.25 v1(-21.5,-3.9) -21.15,-3.55 -21.15,2.116 -20.6,2.666 -20.6,5.623 -19.518,6.705 -13.613,6.705 -12.761,5.852 J10.2@-12.761,4.412
  Bottom w0.2: v1(-21.5,-3.9) R73.1@-20.15,-3.9
SD2_DET: J10.CD R70.1 TVS2.1 | length 30.3
  Top w0.2: v1(-22.9,3.9) -22.9,6.2 -20.395,8.705 -8.505,8.705 -5.065,5.265 J10.CD@-5.065,4.412 -5.065,2.613 -5.569,2.11 TVS2.1@-6.5,2.11
  Bottom w0.2: v1(-22.9,3.9) -21.4,5.4 R70.1@-20.11,5.4
SYS_LED: J1.78 R4.2 | length 11.2
  Top w0.2: R4.2@21.05,11.5 v1(23.1,11.5) ; J1.78@28.095,6.75 v1(29.2,6.75)
  INT1 w0.2: v1(23.1,11.5) 23.61,11.5 28.36,6.75 v1(29.2,6.75)
SYS_RST: C1.2 J1.75 | length 2
  Top w0.2: v1(23.3,6.6) 23.65,6.25 J1.75@24.645,6.25
  Bottom w0.2: C1.2@22.75,6.6 v1(23.3,6.6)
TCK_1V8: J1.27 J6.5 R10.1 | length 22.9
  Top w0.127: v1(13.452,-13.964) 13.452,-14.556 R10.1@13.473,-14.577 ; J6.5@20.875,-17.1 v1(20.875,-16.4) 20.875,-15.825 21.327,-15.373 21.327,-11.173 22.914,-9.586 22.914,-6.524 23.688,-5.75 J1.27@24.645,-5.75
  INT1 w0.127: v1(13.452,-13.964) 14.988,-15.5 17.986,-15.5 19.3,-16.813 20.462,-16.813 v1(20.875,-16.4)
TDI_1V8: J1.25 J6.6 R9.1 | length 20.7
  Top w0.127: R9.1@15.89,-14.577 15.899,-14.568 v1(15.899,-13.964) ; J6.6@22.125,-17.1 v1(22.125,-16.4) 21.654,-15.929 21.654,-11.308 23.3,-9.662 23.3,-6.6 23.65,-6.25 J1.25@24.645,-6.25
  INT1 w0.127: v1(15.899,-13.964) 19.689,-13.964 v1(22.125,-16.4)
TDO_1V8: J1.31 J6.3 | length 15.5
  Top w0.127: J6.3@18.375,-17.1 18.375,-16.725 20.673,-14.427 20.673,-10.827 21.6,-9.9 21.6,-8.7 22.111,-8.189 22.111,-6.402 23.763,-4.75 J1.31@24.645,-4.75
TMS_1V8: J1.29 J6.4 R8.1 | length 21
  Top w0.127: R8.1@14.673,-14.577 v1@14.673,-13.99 ; J6.4@19.625,-17.1 v1(19.625,-16.4) 21,-15.025 21,-11 22,-10 22,-8.762 22.438,-8.324 22.438,-6.537 23.725,-5.25 J1.29@24.645,-5.25
  INT1 w0.127: v1(14.673,-13.964) 15.509,-14.8 18.025,-14.8 v1(19.625,-16.4)
TOUCH_I2C_SCL: J2.65
TOUCH_I2C_SDA: J2.67
TOUCH_INT: J1.58
TOUCH_RST: J1.48
TPRXN_CON: J3.4 T1.14 | length 9.7
  Top w0.2: v1(-0.625,-13.1) -0.225,-12.7 2.4,-12.7 2.9,-13.2 2.9,-15.2 1.912,-16.188 T1.14@1.912,-17.245 T1.14@1.912,-17.445
  Bottom w0.2: J3.4@-0.625,-14.258 v1(-0.625,-13.1)
TPRXP_CON: J3.3 T1.16 | length 11.7
  Top w0.2: v1(-1.875,-13.1) -1.075,-12.3 2.6,-12.3 3.4,-13.1 3.4,-15.2 4.452,-16.252 T1.16@4.452,-17.245
  Bottom w0.2: J3.3@-1.875,-14.258 v1(-1.875,-13.1)
TPTXN_CON: J3.6 T1.9 | length 9.2
  Top w0.2: T1.9@-4.438,-17.207 v1(-4.438,-16.1)
  Bottom w0.2: v1(-4.438,-16.1) -3.938,-16.6 0.6,-16.6 1.875,-15.325 J3.6@1.875,-14.258
TPTXP_CON: J3.5 T1.11 | length 5.1
  Top w0.2: v1(-1.9,-16.1) -1.9,-17.243 T1.11@-1.898,-17.245
  Bottom w0.2: v1(-1.9,-16.1) 0,-16.1 0.625,-15.475 J3.5@0.625,-14.258
TXD_DEBUG: J1.3 J5.2 | length 10.8
  Top w0.2: J1.3@24.645,-11.75 25.85,-11.75 v1(26.1,-12)
  INT1 w0.2: v1(18.875,-12.659) 19.325,-13.109 24.507,-13.109 25.616,-12 v1(26.1,-12)
  Bottom w0.2: J5.2@18.875,-14.058 v1(18.875,-12.659)
USB_OTG_DN: J1.21
USB_OTG_DP: J1.19
USB_OTG_EN: J2.11 TP4.1 | length 3.1
  Top w0.2: J2.11@-24.645,-9.75 v1(-21.5,-9.75)
USB_OTG_ID: J1.15 TP3.1 | length 1.7
  Top w0.127: J1.15@24.645,-8.75 25.85,-8.75 v1(26.2,-9.1)
VADJ_0: J2.36 J2.38 | length 0.5
  Top w0.2: J2.36@-28.095,-3.75 J2.38@-28.095,-3.25
VADJ_1: J2.40 J2.42 | length 0.5
  Top w0.2: J2.40@-28.095,-2.75 J2.42@-28.095,-2.25
VADJ_2: J2.50 J2.52 J2.54 | length 1
  Top w0.2: J2.50@-28.095,-0.25 J2.52@-28.095,0.25 J2.54@-28.095,0.75
VDD_CAM: BC21.2 BC26.2 FB6.2 FB7.2 U8.1 U8.3 U11.1 U11.3 | length 19.7
  Top w0.2: FB7.2@-1.189,9.429 FB7.2@-1.15,9.389
  Top w0.254: U11.3@1.85,0.15 1.85,1.15 2.9,2.2 BC26.2@3.75,2.2
  Top w0.4: FB6.2@-2.3,9.429 FB7.2@-1.189,9.429 ; v1(-0.8,8.45) FB7.2@-0.8,9.438 ; U11.1@3.75,0.15 BC26.2@3.75,2.2 v1(3.75,4.3) U8.1@3.75,5.05 ; U8.3@3.75,7.077 BC21.2@3.75,8.15
  INT1 w0.4: v1(-0.8,8.45) 0.05,7.6 v1(3.75,7.6) v1(3.75,4.3)
WIFI_EN: J1.60
WIFI_WAKE_OUT: J1.52
XTAL_I: C17.2 U4.45 Y1.1 | length 7.9
  Top w0.2: Y1.1@6.374,-4.261 6.374,-5.211 6.519,-5.357 C17.2@9.505,-5.357 11.235,-5.357 11.592,-5 U4.45@13.068,-5
XTAL_O: C18.2 U4.46 Y1.3 | length 5.6
  Top w0.2: Y1.3@7.874,-6.461 10.697,-6.461 11.758,-5.4 U4.46@13.068,-5.4
pads on no net: D3.3 J1.M1 J1.M2 J2.6 J2.12 J2.48 J10.13 J10.14 OSC1.1 SW1.5 SW1.6 U4.33 U4.38 U4.39 U4.40 U4.41 U4.42 U4.43 U4.44 U16.7 U19.5 U19.6 U19.9 U19.10 Y2.2 Y2.3

## Polygon pours and split planes (outlines as drawn)
GND on INT1 "GND_INT" (solid, remove dead copper, pour order 6): -26.212,13.344 -28.095,11.461 -28.095,5.25 -28.095,4.295 -26.8,3 -18.3,-5.5 -12.7,-5.5 -6.9,-5.5 -6.5,-5.9 -5.9,-6.5 0.8,-6.5 1.6,-6.5 3.2,-4.9 3.2,-3.9 3.2,-3.3 0,-0.1 -2.2,2.1 -3.2,2.1 -3.433,2.1 -8.733,7.4 -10.038,8.705 -13.5,8.705 -19.781,8.705 -19.8,8.686 -24.458,13.344 -26.212,13.344
+5.0V on INT1 "INT1-5V" (solid, remove dead copper, pour order 12): -6,20.6 -7.3,19.3 -7.3,18.6 -7.3,16 -7.3,15.859 -5.641,14.2 -5.441,14 -2.5,14 16.1,14 19.5,10.6 20.9,9.2 20.9,6.3 20.9,1.6 21.3,1.2 21.5,1 22.4,1 23.452,1 23.652,1.2 23.8,1.348 23.8,1.8 23.8,6.3 23.8,11.527 21.819,13.508 15.827,19.5 13.3,19.5 -7.1,19.5
+3.3V on INT1 "3.3V" (solid, remove dead copper, pour order 6): 12.434,12.4 12.134,12.1 12.134,11.5 12.134,11.234 11.7,10.8 11.5,10.6 9.55,10.6 8.975,10.6 8.5,11.075 7.575,12 5.9,12 0.238,12 -0.165,11.597 -0.35,11.412 -0.35,10.998 -0.35,10.807 -0.252,10.71 -0.043,10.5 0.3,10.5 0.325,10.5 0.9,11.075 0.925,11.1 2.2,11.1 6.2,11.1 7,10.3 7,8.3 7,8.2 6.4,7.6 6.3,7.5 6.3,-5.8 6.3,-6.1 5.6,-6.8 5.5,-6.9 3.4,-6.9 -18.1,-6.9 -18.4,-6.6 -18.7,-6.6 -18.85,-6.6 -18.95,-6.7 -19.019,-6.769 -19.019,-7.208 -19.019,-8.181 -18.9,-8.3 -18.8,-8.4 -18.3,-8.4 -18.2,-8.4 -18,-8.2 -17.8,-8 -16.9,-8 5.5,-8 6.1,-8.6 6.35,-8.85 6.35,-9.245 6.35,-10.85 6.6,-11.1 7.9,-12.4 13.605,-12.4 15.8,-12.4 16,-12.2 18.2,-10 18.3,-10 18.5,-9.8 18.6,-9.7 18.6,-9.4 18.6,-8.958 18.458,-8.816 18.41,-8.767 17.8,-8.767 16.775,-8.767 15.842,-9.7 14.942,-10.6 13.8,-10.6 8.295,-10.6 7.571,-9.876 7.5,-9.805 7.5,-8.8 7.5,6.521 8.616,7.637 10.279,9.3 11.5,9.3 12.7,9.3 13.6,10.2 13.95,10.55 13.95,11.55 13.95,12.016 13.566,12.4
GND on GND "GND" (solid, remove dead copper, pour order 19): -46.704,21.696 -46.704,-22.972 40.681,-22.972 40.681,22.775
GND on Top "TOP_GND" (solid, remove dead copper, pour order 10): -6.35,-9.245 -6.35,-16.355 6.35,-16.355 6.35,-9.245
GND on Top "TOP_GND" (solid, remove dead copper, pour order 8): -18.963,18.919 -18.963,5.945 -16.656,3.638 -5.4,3.638 -4.862,3.638 -4.25,4.25 -4,4.5 -4,18.057 -4,19

## Keep-outs
Top:
  lines w0.2: -29,-19 28.994,-19
Bottom:
  lines w0.2: 29.994,-18 cw(c28.994,-18) 28.994,-19 -29,-19 cw(c-29,-18) -30,-18 -30,18 cw(c-29,18) -29,19 28.994,19 cw(c28.994,18) 29.994,18 ; 30,-18 30,18
Keep-Out Layer:
  lines w0.2: 29.994,-18 cw(c28.994,-18) 28.994,-19 -29,-19 cw(c-29,-18) -30,-18 -30,18 cw(c-29,18) -29,19 28.994,19 cw(c28.994,18) 29.994,18 ; 30,-18 30,18
Assembly Drawing Top:
  lines w0.2: 29.994,-18 cw(c28.994,-18) 28.994,-19 -29,-19 cw(c-29,-18) -30,-18 -30,18 cw(c-29,18) -29,19 28.994,19 cw(c28.994,18) 29.994,18 ; 30,-18 30,18

## Other copper
Top:
  rectangle net LX_1V2: 18,4.7 19.3,5.9
  region net GND: 24.05,0.75 23.8,0.5 23.8,-0.5 24.2,-0.9 26.1,-0.9 26.62,-0.38 26.62,0.48 26.35,0.75
  region net GND: 25.053,5.447 24.6,5.9 23.256,5.9 22.6,5.244 22.6,3.9 23.25,3.25 24.703,3.25 25.053,3.6
  region: 30.085,4.35
  region net +5.0V: 25.102,2.75 22.15,2.75 22.066,2.666 22.066,1.334 22.2,1.2 25.103,1.2 25.153,1.25 25.153,2.7
  region net +1.8V: 3.4,11 3.6,11.2 4.4,11.2 4.9,10.7 4.9,10.2 4.2,9.5 3.865,9.5 3.4,9.965
  region net +3.3V: 13.27,10.87 12.83,10.87 12.1,11.6 12.1,12.2 12.4,12.5 13.532,12.5 13.916,12.116 13.916,11.516
INT1:
  region net +3.3V: 12.134,12.1 12.134,11.5 12.734,10.9 13.3,10.9 13.95,11.55 13.95,12.016 13.566,12.4 12.434,12.4
GND:
  region net +1.8V: 4.4,10.8 3.59,9.99 3.59,9.775 3.765,9.6 4,9.6 4.784,10.384 4.784,10.7 4.684,10.8
Bottom:
  region net GND: -17.075,12.6 -17.402,12.273 -17.402,10.789 -17.389,10.789 -16.4,9.8 -8.7,9.8 -8.1,10.4 -8.1,11.1 -8.3,11.3 -14.6,11.3 -15.9,12.6
  region net LX_1V2: 18.559,5.9 18.413,5.753 18.413,4.787 18.5,4.7 18.9,4.7 18.959,4.759 18.959,5.741 18.8,5.9
  region net GND: -5,-11.7 -5,-12.543 -4.7,-12.843 -3.957,-12.843 -3.525,-13.275 -3.525,-14.385 -2.725,-14.385 -2.725,-13.125 -2.3,-12.7 -2.3,-11.7 -2.5,-11.5 -4.8,-11.5
  region net +5.0V: -1,17.8 -1,16.3 -1.673,15.627 -8.4,15.627 -8.4,17.9 -8.1,18.2 -1.4,18.2
  pour cut-out: -0.996,18.4 -1.002,16.124 -4.5,16.1 -7.1,13.4 -7.1,11.7 -14.3,11.705 -14.3,18.138 -14.038,18.4
  region net +3.3V: 10.85,11.5 11.65,12.3 14.55,12.3 14.834,12.016 14.834,11.084 14.55,10.8 11.25,10.8 10.85,11.2
  region: -298.997,-274.998
  region net +1.8V: 3.414,11.214 3.6,11.4 5.2,11.4 5.55,11.05 5.55,10.35 4.8,9.6 3.765,9.6 3.414,9.951
Multi-Layer:
  lines w0.2: 29.994,-18 cw(c28.994,-18) 28.994,-19 -29,-19 cw(c-29,-18) -30,-18 -30,18 cw(c-29,18) -29,19 28.994,19 cw(c28.994,18) 29.994,18 ; 30,-18 30,18

## Silkscreen, mask and mechanical layers (free items; w line width, h text height)
Silkscreen Top:
  lines w0.2: 29.994,-18 cw(c28.994,-18) 28.994,-19 -29,-19 cw(c-29,-18) -30,-18 -30,18 cw(c-29,18) -29,19 28.994,19 cw(c28.994,18) 29.994,18 ; 30,-18 30,18
Silkscreen Bottom:
  text "NaiS802" at -13.5,6.9 h1.52
  text "v0.6" at -24.645,6.75 h1
Outline:
  lines w0.2: 29.994,-18 cw(c28.994,-18) 28.994,-19 -29,-19 cw(c-29,-18) -30,-18 -30,18 cw(c-29,18) -29,19 28.994,19 cw(c28.994,18) 29.994,18 ; 30,-18 30,18